# Altium PCB PCB_tms320f28069.pcbdoc (part 1 of 2)
Units mil, origin at the board's own origin, x right, y up, seen from the top; angles counter-clockwise.
Board outline 7604.36 x 4553.97 mil, 2 copper layers (Top Layer, Bottom Layer); 149 components, 214 nets, 843 pads, 168 vias.
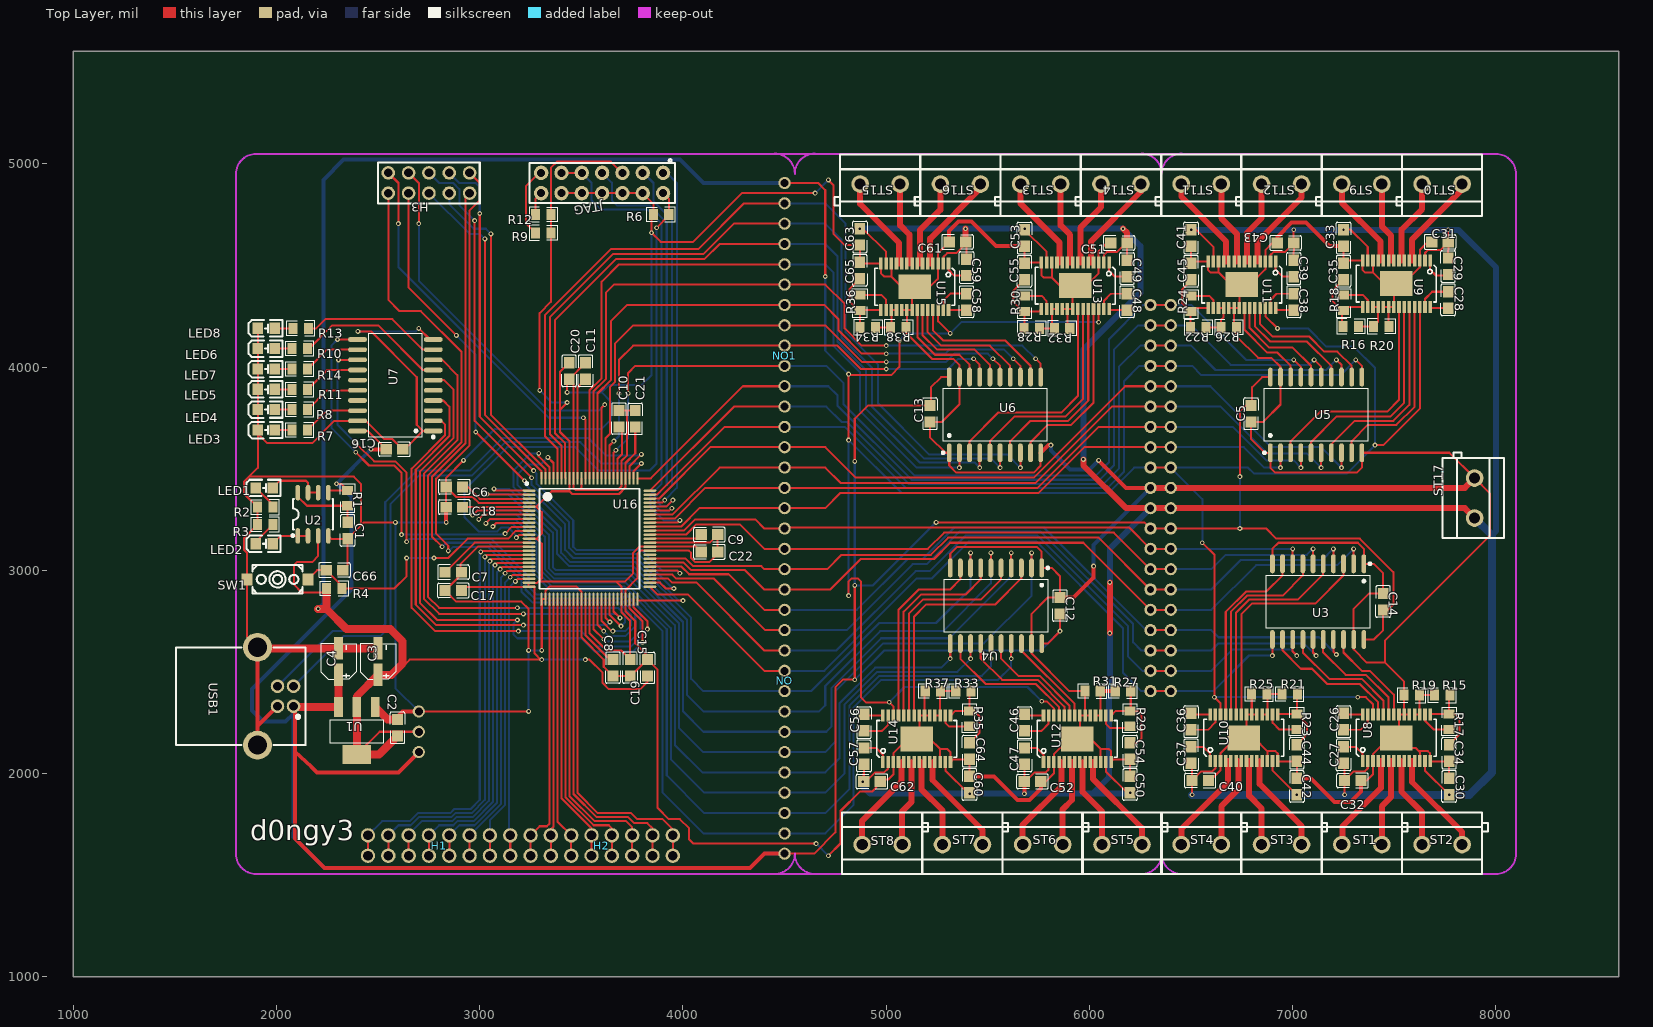
[diagram p0: Top Layer view]
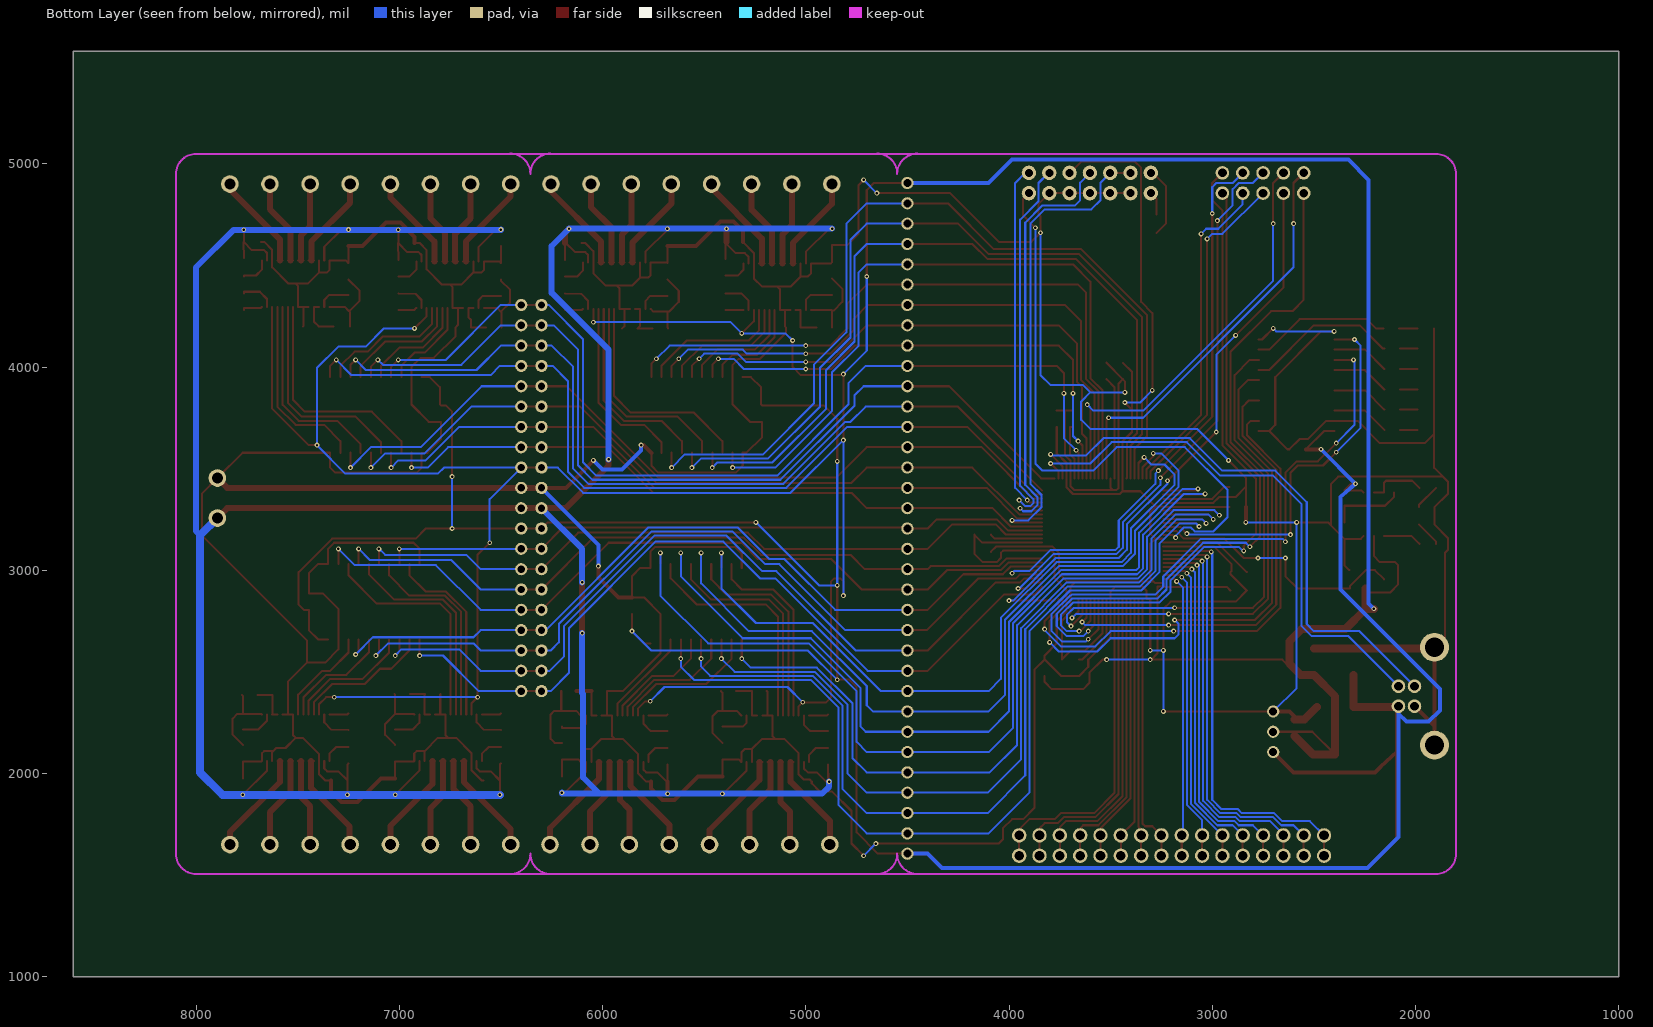
[diagram p1: Bottom Layer view, seen from below]

## Layer stack, top to bottom
Top Layer: signal copper (thickness not stored)
Dielectric: dielectric 12.6, FR-4, Dk 4.8
Bottom Layer: signal copper (thickness not stored)

## Board outline
8604.36,1000 1000,1000 1000,5553.97 8604.36,5553.97

## Components (designator, comment, footprint, x,y, rotation, side; value= is the part's Value field where it differs from the comment)
C1 "1uF" C0805 2350.16,3195.67 r90 top
C2 "470pF" C0805 2595.16,2225.67 r270 top
C3 "10uF" CAP-SMD_BD4.0-L4.3-W4.3-FD-LS4.8 2500.16,2550.67 r90 top
C4 "10uF" CAP-SMD_BD4.0-L4.3-W4.3-FD-LS4.8 2305.16,2550.67 r90 top
C5 "1uF" C0805 6795.16,3770.67 r270 top
C6 "1.2uF" C0805 2875.16,3410.67 r0 top
C7 "1.2uF" C0805 2870.16,2990.67 r180 top
C8 "1.2uF" C0805 3655.16,2520.67 r90 top
C9 "1.2uF" C0805 4130.16,3175.67 r0 top
C10 "1.2uF" C0805 3685.16,3745.67 r90 top
C11 "1.2uF" C0805 3520.16,3980.67 r90 top
C12 "1uF" C0805 5855.16,2825.67 r90 top
C13 "1uF" C0805 5215.16,3770.67 r270 top
C14 "1uF" C0805 7445.16,2845.67 r90 top
C15 "1uF" C0805 3825.16,2520.67 r270 top
C16 "1uF" C0805 2580.16,3595.67 r0 top
C17 "2.2uF" C0805 2870.16,2900.67 r0 top
C18 "2.2uF" C0805 2875.16,3310.67 r0 top
C19 "2.2uF" C0805 3740.16,2520.67 r90 top
C20 "2.2uF" C0805 3440.16,3980.67 r90 top
C21 "2.2uF" C0805 3765.16,3745.67 r270 top
C22 "2.2uF" C0805 4130.16,3090.67 r0 top
C26 "22nF" C0805 7250.16,2255.67 r270 top
C27 "220nF" C0805 7250.16,2090.67 r90 top
C28 "22nF" C0805 7765.16,4330.67 r90 top
C29 "220nF" C0805 7765.16,4495.67 r270 top
C30 "10nF" C0805 7770.16,1935.67 r90 top
C31 "10nF" C0805 7725.16,4615.67 r180 top
C32 "10nF" C0805 7295.16,1965.67 r0 top
C33 "10nF" C0805 7250.16,4635.67 r270 top
C34 "470nF" C0805 7770.16,2100.67 r270 top
C35 "470nF" C0805 7250.16,4470.67 r90 top
C36 "22nF" C0805 6500.16,2255.67 r270 top
C37 "220nF" C0805 6500.16,2090.67 r90 top
C38 "22nF" C0805 7005.16,4320.67 r90 top
C39 "220nF" C0805 7005.16,4485.67 r270 top
C40 "10nF" C0805 6545.16,1965.67 r0 top
C41 "10nF" C0805 6500.16,4635.67 r270 top
C42 "10nF" C0805 7020.16,1935.67 r90 top
C43 "10nF" C0805 6965.16,4610.67 r180 top
C44 "470nF" C0805 7020.16,2100.67 r270 top
C45 "470nF" C0805 6500.16,4470.67 r90 top
C46 "22nF" C0805 5680.16,2250.67 r270 top
C47 "220nF" C0805 5680.16,2085.67 r90 top
C48 "22nF" C0805 6185.16,4320.67 r90 top
C49 "220nF" C0805 6185.16,4485.67 r270 top
C50 "10nF" C0805 6200.16,1945.67 r90 top
C51 "10nF" C0805 6145.16,4610.67 r180 top
C52 "10nF" C0805 5720.16,1960.67 r0 top
C53 "10nF" C0805 5680.16,4635.67 r270 top
C54 "470nF" C0805 6200.16,2110.67 r270 top
C55 "470nF" C0805 5680.16,4470.67 r90 top
C56 "22nF" C0805 4890.16,2250.67 r270 top
C57 "220nF" C0805 4890.16,2085.67 r90 top
C58 "22nF" C0805 5395.16,4320.67 r90 top
C59 "220nF" C0805 5395.16,4490.67 r270 top
C60 "10nF" C0805 5410.16,1945.67 r90 top
C61 "10nF" C0805 5350.16,4615.67 r180 top
C62 "10nF" C0805 4930.16,1960.67 r0 top
C63 "10nF" C0805 4870.16,4640.67 r270 top
C64 "470nF" C0805 5410.16,2110.67 r270 top
C65 "470nF" C0805 4870.16,4475.67 r90 top
C66 "100nF" C0805 2285.16,3000.67 r180 top
H1 "HDR-2×8H" HDR-TH_16P-P2.54-V-M-R2-C8-S2.54 2800.16,1645.67 r180 top
H2 "HDR-2×8H" HDR-TH_16P-P2.54-V-M-R2-C8-S2.54 3600.16,1645.67 r0 top
H3 "com" HDR-TH_10P-P2.54-V-F-R2-C5-S2.54-3 2750.16,4905.67 r180 top
JTAG "JTAG" HDR-TH_14P-P2.54-V-F-R2-C7-S2.54 3602.12,4905.67 r180 top
LED1 "LED" LED0805-FD 1940.16,3405.67 r180 top
LED2 "LED" LED0805-FD 1940.16,3130.67 r180 top
LED3 "LED" LED0805-FD 1950.16,3690.67 r180 top
LED4 "LED" LED0805-FD 1950.16,3790.67 r180 top
LED5 "LED" LED0805-FD 1950.16,3890.67 r180 top
LED6 "LED" LED0805-FD 1950.16,4090.67 r180 top
LED7 "LED" LED0805-FD 1950.16,3990.67 r180 top
LED8 "LED" LED0805-FD 1950.16,4190.67 r180 top
NO "1X16P2.54" 1X16P2.54 4500.16,2455.67 r0 top
NO1 "1X16P2.54" 1X16P2.54 4500.16,4055.67 r0 top
R1 "1.5kΩ" R0805 2350.16,3355.67 r270 top
R2 "1.5kΩ" R0805 1945.16,3310.67 r0 top
R3 "1.5kΩ" R0805 1945.16,3225.67 r0 top
R4 "1kΩ" R0805 2285.16,2910.67 r0 top
R6 "4.7kΩ" R0805 3892.12,4750.67 r0 top
R7 "1.5kΩ" R0805 2115.16,3690.67 r0 top
R8 "1.5kΩ" R0805 2115.16,3790.67 r0 top
R9 "4.7kΩ" R0805 3312.12,4660.67 r180 top
R10 "1.5kΩ" R0805 2115.16,4090.67 r0 top
R11 "1.5kΩ" R0805 2115.16,3889.67 r0 top
R12 "4.7kΩ" R0805 3312.12,4750.67 r180 top
R13 "1.5kΩ" R0805 2120.16,4190.67 r0 top
R14 "1.5kΩ" R0805 2115.16,3990.67 r0 top
R15 "100Ω" R0805 7735.16,2385.67 r0 top
R16 "100Ω" R0805 7285.16,4200.67 r180 top
R17 "4.99kΩ" R0805 7770.16,2255.67 r90 top
R18 "4.99kΩ" R0805 7250.16,4315.67 r270 top
R19 "100Ω" R0805 7585.16,2385.67 r0 top
R20 "100Ω" R0805 7435.16,4200.67 r180 top
R21 "100Ω" R0805 6985.16,2390.67 r0 top
R22 "100Ω" R0805 6535.16,4195.67 r180 top
R23 "4.99kΩ" R0805 7020.16,2255.67 r90 top
R24 "4.99kΩ" R0805 6500.16,4310.67 r270 top
R25 "100Ω" R0805 6835.16,2390.67 r0 top
R26 "100Ω" R0805 6685.16,4195.67 r180 top
R27 "100Ω" R0805 6165.16,2405.67 r0 top
R28 "100Ω" R0805 5715.16,4190.67 r180 top
R29 "4.99kΩ" R0805 6200.16,2270.67 r90 top
R30 "4.99kΩ" R0805 5680.16,4310.67 r270 top
R31 "100Ω" R0805 6015.16,2405.67 r0 top
R32 "100Ω" R0805 5865.16,4190.67 r180 top
R33 "100Ω" R0805 5380.16,2405.67 r0 top
R34 "100Ω" R0805 4910.16,4195.67 r180 top
R35 "4.99kΩ" R0805 5410.16,2270.67 r90 top
R36 "4.99kΩ" R0805 4870.16,4315.67 r270 top
R37 "100Ω" R0805 5230.16,2405.67 r0 top
R38 "100Ω" R0805 5060.16,4195.67 r180 top
ST1 "KF301-5.0-2P" CONN-TH_P5.00_KF301-5.0-2P 7340.16,1650.67 r0 top
ST2 "KF301-5.0-2P" CONN-TH_P5.00_KF301-5.0-2P 7735.16,1650.67 r0 top
ST3 "KF301-5.0-2P" CONN-TH_P5.00_KF301-5.0-2P 6945.16,1650.67 r0 top
ST4 "KF301-5.0-2P" CONN-TH_P5.00_KF301-5.0-2P 6550.16,1650.67 r0 top
ST5 "KF301-5.0-2P" CONN-TH_P5.00_KF301-5.0-2P 6160.16,1650.67 r0 top
ST6 "KF301-5.0-2P" CONN-TH_P5.00_KF301-5.0-2P 5770.16,1650.67 r0 top
ST7 "KF301-5.0-2P" CONN-TH_P5.00_KF301-5.0-2P 5375.16,1650.67 r0 top
ST8 "KF301-5.0-2P" CONN-TH_P5.00_KF301-5.0-2P 4980.16,1650.67 r0 top
ST9 "KF301-5.0-2P" CONN-TH_P5.00_KF301-5.0-2P 7340.16,4900.67 r180 top
ST10 "KF301-5.0-2P" CONN-TH_P5.00_KF301-5.0-2P 7735.16,4900.67 r180 top
ST11 "KF301-5.0-2P" CONN-TH_P5.00_KF301-5.0-2P 6550.16,4900.67 r180 top
ST12 "KF301-5.0-2P" CONN-TH_P5.00_KF301-5.0-2P 6945.16,4900.67 r180 top
ST13 "KF301-5.0-2P" CONN-TH_P5.00_KF301-5.0-2P 5760.16,4900.67 r180 top
ST14 "KF301-5.0-2P" CONN-TH_P5.00_KF301-5.0-2P 6155.16,4900.67 r180 top
ST15 "KF301-5.0-2P" CONN-TH_P5.00_KF301-5.0-2P 4970.16,4900.67 r180 top
ST16 "KF301-5.0-2P" CONN-TH_P5.00_KF301-5.0-2P 5365.16,4900.67 r180 top
ST17 "KF301-5.0-2P" CONN-TH_P5.00_KF301-5.0-2P 7895.16,3355.67 r90 top
SW1 "K2" KEY-SMD_L6.2-W3.6-LS8.0 2005.16,2955.67 r180 top
U1 "AMS1117-ADJ_C2891840" SOT-223-3_L6.5-W3.4-P2.30-LS7.0-BR 2395.16,2210.67 r90 top
U2 "LM358A-SR" SOIC-8_L5.0-W4.0-P1.27-LS6.0-BL 2180.16,3275.67 r0 top
U3 "74HC244D" SOIC-20_L13.0-W7.6-P1.27-LS10.3-BL 7125.16,2845.67 r180 top
U4 "74HC244D" SOIC-20_L13.0-W7.6-P1.27-LS10.3-BL 5540.16,2825.67 r180 top
U5 "74HC244D" SOIC-20_L13.0-W7.6-P1.27-LS10.3-BL 7115.16,3764.61 r0 top
U6 "74HC244D" SOIC-20_L13.0-W7.6-P1.27-LS10.3-BL 5535.16,3764.61 r0 top
U7 "74HC244D" SOIC-20_L13.0-W7.6-P1.27-LS10.3-BL 2585.16,3910.67 r90 top
U8 "DRV8424PPWPR" TSSOP_28_POWERPAD 7510.16,2175.67 r90 top
U9 "DRV8424PPWPR" TSSOP_28_POWERPAD 7510.16,4410.67 r270 top
U10 "DRV8424PPWPR" TSSOP_28_POWERPAD 6760.16,2175.67 r90 top
U11 "DRV8424PPWPR" TSSOP_28_POWERPAD 6750.16,4405.67 r270 top
U12 "DRV8424PPWPR" TSSOP_28_POWERPAD 5940.16,2170.67 r90 top
U13 "DRV8424PPWPR" TSSOP_28_POWERPAD 5930.16,4400.67 r270 top
U14 "DRV8424PPWPR" TSSOP_28_POWERPAD 5150.16,2170.67 r90 top
U15 "DRV8424PPWPR" TSSOP_28_POWERPAD 5140.16,4395.67 r270 top
U16 "TMS320F28069PZT" LQFP-100_L14.0-W14.0-P0.50-LS16.0-BL 3540.16,3155.67 r270 top
USB1 "USB" USB-B_TH_BF90 1995.16,2380.67 r270 top

## Footprints (in the part's own frame and the unit in brackets; to place one, negate y for a bottom-side part, rotate by r counter-clockwise, add the part's x,y. Pads: shape width x height; smd on the part's side, far side on the other; paste and mask are expansions set on the pad)
1X16P2.54 [mil]
  round 60 hole 39.37: 1(0,750) 2(0,650) 3(0,550) 4(0,450) 5(0,350) 6(0,250) 7(0,150) 8(0,50) 9(0,-50) 10(0,-150) 11(0,-250) 12(0,-350) 13(0,-450) 14(0,-550) 15(0,-650) 16(0,-750)
C0805 [mm]
  rect 1.41x1.35 smd: 1(-1.03,0) 2(1.03,0)
  silkscreen extent -1.96,-0.9 1.96,0.9
CAP-SMD_BD4.0-L4.3-W4.3-FD-LS4.8 [mm]
  rect 2.8x1.1 smd: 1(-1.661,0) 2(1.66,0)
  silkscreen extent -2.22,-2.23 2.24,2.23
CONN-TH_P5.00_KF301-5.0-2P [mm]
  round 2.2 hole 1.4: 1(-2.5,0) 2(2.5,0)
  silkscreen extent -5,-3.7 5.71,4
HDR-TH_10P-P2.54-V-F-R2-C5-S2.54-3 [mm]
  round 1.7 hole 1.1: 1(5.08,1.27) 2(5.08,-1.27) 3(2.54,1.27) 4(2.54,-1.27) 5(0,1.27) 6(0,-1.27) 7(-2.54,1.27) 8(-2.54,-1.27) 9(-5.08,1.27) 10(-5.08,-1.27)
  silkscreen extent -6.35,-2.54 6.35,2.54
HDR-TH_14P-P2.54-V-F-R2-C7-S2.54 [mm]
  round 1.8 hole 1: 1(-7.62,-1.27) 2(-7.62,1.27) 3(-5.08,-1.27) 4(-5.08,1.27) 5(-2.54,-1.27) 6(-2.54,1.27) 7(0,-1.27) 8(0,1.27) 9(2.54,-1.27) 10(2.54,1.27) 11(5.08,-1.27) 12(5.08,1.27) 13(7.62,-1.27) 14(7.62,1.27)
  silkscreen extent -9.09,-2.97 9.09,2.5
HDR-TH_16P-P2.54-V-M-R2-C8-S2.54 [mm]
  round 1.8 hole 1.2: 1(-8.89,-1.27) 2(-8.89,1.27) 3(-6.35,-1.27) 4(-6.35,1.27) 5(-3.81,-1.27) 6(-3.81,1.27) 7(-1.27,-1.27) 8(-1.27,1.27) 9(1.27,-1.27) 10(1.27,1.27) 11(3.81,-1.27) 12(3.81,1.27) 13(6.35,-1.27) 14(6.35,1.27) 15(8.89,-1.27) 16(8.89,1.27)
KEY-SMD_L6.2-W3.6-LS8.0 [mm]
  rect 1.4x1.5 smd: 1(-3.8,0) 2(3.8,0)
  silkscreen extent -3.1,-1.8 3.1,1.8
LED0805-FD [mil]
  rect 51.2x55.1 smd: 1(-41.35,0) 2(41.35,0)
  silkscreen extent -78,-40 88,41
LQFP-100_L14.0-W14.0-P0.50-LS16.0-BL [mm]
  oval 0.3x1.6 smd: 1(-6,-7.55) 2(-5.5,-7.55) 3(-5,-7.55) 4(-4.5,-7.55) 5(-4,-7.55) 6(-3.5,-7.55) 7(-3,-7.55) 8(-2.5,-7.55) 9(-2,-7.55) 10(-1.5,-7.55) 11(-1,-7.55) 12(-0.5,-7.55) 13(0,-7.55) 14(0.5,-7.55) 15(1,-7.55) 16(1.5,-7.55) 17(2,-7.55) 18(2.5,-7.55) 19(3,-7.55) 20(3.5,-7.55) 21(4,-7.55) 22(4.5,-7.55) 23(5,-7.55) 24(5.5,-7.55) 25(6,-7.55) 51(6,7.55) 52(5.5,7.55) 53(5,7.55) 54(4.5,7.55) 55(4,7.55) 56(3.5,7.55) 57(3,7.55) 58(2.5,7.55) 59(2,7.55) 60(1.5,7.55) 61(1,7.55) 62(0.5,7.55) 63(0,7.55) 64(-0.5,7.55) 65(-1,7.55) 66(-1.5,7.55) 67(-2,7.55) 68(-2.5,7.55) 69(-3,7.55) 70(-3.5,7.55) 71(-4,7.55) 72(-4.5,7.55) 73(-5,7.55) 74(-5.5,7.55) 75(-6,7.55)
  oval 1.6x0.3 smd: 26(7.55,-6) 27(7.55,-5.5) 28(7.55,-5) 29(7.55,-4.5) 30(7.55,-4) 31(7.55,-3.5) 32(7.55,-3) 33(7.55,-2.5) 34(7.55,-2) 35(7.55,-1.5) 36(7.55,-1) 37(7.55,-0.5) 38(7.55,0) 39(7.55,0.5) 40(7.55,1) 41(7.55,1.5) 42(7.55,2) 43(7.55,2.5) 44(7.55,3) 45(7.55,3.5) 46(7.55,4) 47(7.55,4.5) 48(7.55,5) 49(7.55,5.5) 50(7.55,6) 76(-7.55,6) 77(-7.55,5.5) 78(-7.55,5) 79(-7.55,4.5) 80(-7.55,4) 81(-7.55,3.5) 82(-7.55,3) 83(-7.55,2.5) 84(-7.55,2) 85(-7.55,1.5) 86(-7.55,1) 87(-7.55,0.5) 88(-7.55,0) 89(-7.55,-0.5) 90(-7.55,-1) 91(-7.55,-1.5) 92(-7.55,-2) 93(-7.55,-2.5) 94(-7.55,-3) 95(-7.55,-3.5) 96(-7.55,-4) 97(-7.55,-4.5) 98(-7.55,-5) 99(-7.55,-5.5) 100(-7.55,-6)
  silkscreen extent -7.03,-8 6.25,6.25
R0805 [mil]
  rect 44.59x54.21 smd: 1(-38.04,0) 2(38.04,0)
  silkscreen extent -69,-36 69,36
SOIC-8_L5.0-W4.0-P1.27-LS6.0-BL [mil]
  oval 22.38x76.78 smd: 1(-75,-106.5) 2(-25,-106.5) 3(25,-106.5) 4(75,-106.5) 5(75,106.5) 6(25,106.5) 7(-25,106.5) 8(-75,106.5)
  silkscreen extent -106,-111 98,75
SOIC-20_L13.0-W7.6-P1.27-LS10.3-BL [mm]
  oval 0.595x2.36 smd: 1(-5.715,-4.73) 2(-4.445,-4.73) 3(-3.175,-4.73) 4(-1.905,-4.73) 5(-0.635,-4.73) 6(0.635,-4.73) 7(1.905,-4.73) 8(3.175,-4.73) 9(4.445,-4.73) 10(5.715,-4.73) 11(5.715,4.73) 12(4.445,4.73) 13(3.175,4.73) 14(1.905,4.73) 15(0.635,4.73) 16(-0.635,4.73) 17(-1.905,4.73) 18(-3.175,4.73) 19(-4.445,4.73) 20(-5.715,4.73)
  silkscreen extent -6.61,-4.88 6.48,3.32
SOT-223-3_L6.5-W3.4-P2.30-LS7.0-BR [mm]
  rect 2.5x1.1 smd: 1(2.97,-2.3) 2(2.97,0) 3(2.97,2.3)
  rect 2.34x3.6 smd: 4(-2.97,0)
  silkscreen extent -1.57,-3.33 1.37,3.33
TSSOP_28_POWERPAD [mm]
  rect 1.5x0.45 smd: 1(-2.9,4.225) 2(-2.9,3.575) 3(-2.9,2.925) 4(-2.9,2.275) 5(-2.9,1.625) 6(-2.9,0.975) 6(-2.9,0.975) 7(-2.9,0.325) 8(-2.9,-0.325) 9(-2.9,-0.975) 10(-2.9,-1.625) 11(-2.9,-2.275) 12(-2.9,-2.925) 13(-2.9,-3.575) 14(-2.9,-4.225) 15(2.9,-4.225) 16(2.9,-3.575) 17(2.9,-2.925) 18(2.9,-2.275) 19(2.9,-1.625) 20(2.9,-0.975) 21(2.9,-0.325) 22(2.9,0.325) 23(2.9,0.975) 24(2.9,1.625) 25(2.9,2.275) 26(2.9,2.925) 27(2.9,3.575) 28(2.9,4.225)
  rect 3.1x4.05 smd: 29(0,0)
  silkscreen extent -2.3,-5 2.3,5
USB-B_TH_BF90 [mm]
  round 1.7 hole 1.1: 1(1.25,2.25) 2(-1.25,2.25) 3(-1.25,0.25) 4(1.25,0.25)
  round 3.6 hole 2.4: 5(-6.116,-2.25) 5(6.116,-2.25)
  silkscreen extent -6.1,-12.45 6.11,3.75

## Free pads (board coordinates)
  round 60 hole 39.37: 1(4500.16,1605.67) 2(4500.16,4905.67) 4(2700.16,2305.67) 5(2700.16,2205.67) 6(2700.16,2105.67)
  round 60 hole 36: 7(6300.16,3905.67) 8(6300.16,3805.67) 9(6300.16,3705.67) 10(6300.16,3605.67) 11(6300.16,4305.67) 12(6300.16,4205.67) 13(6300.16,4105.67) 14(6300.16,4005.67) 15(6300.16,2805.67) 16(6300.16,2905.67) 17(6300.16,3005.67) 18(6300.16,3105.67) 19(6300.16,2705.67) 20(6300.16,2605.67) 21(6300.16,2505.67) 22(6300.16,2405.67) 24(6400.16,4305.67) 25(6400.16,4205.67) 26(6400.16,4105.67) 27(6400.16,4005.67) 28(6400.16,3905.67) 29(6400.16,3805.67) 30(6400.16,3705.67) 31(6400.16,3605.67) 32(6400.16,2405.67) 33(6400.16,2505.67) 34(6400.16,2605.67) 35(6400.16,2705.67) 36(6400.16,2805.67) 37(6400.16,2905.67) 38(6400.16,3005.67) 39(6400.16,3105.67) 40(6400.16,3405.67) 41(6400.16,3305.67) 42(6300.16,3405.67) 43(6300.16,3305.67) 44(6300.16,3505.67) 45(6400.16,3505.67) 46(6300.16,3205.67) 47(6400.16,3205.67)

## Via types
v1: diameter 24, hole 12, Top Layer to Bottom Layer, tented both sides, 168 vias

## Nets (pads, with @x,y where several pads share a name; then routed paths per layer and width w, separated by ;. In a path a pad name is that pad's centre, name@x,y a point inside that pad or via, vN(x,y) a via of type N, cw(c..) or ccw(c..) an arc to the next point about the centre after c; other vN are vias at no path point)
3.3V: C2.2 C3.1 C15.2 C17.2 C18.2 C19.2 C20.2 C21.2 C22.1 JTAG.5 pad.2 pad.5 pad.44 pad.45 R4.1 R9.1 R12.1 U1.2 U1.4 U2.3 U8.26 U9.26 U10.26 U11.26 U12.26 U13.26 U14.26 U15.26 U16.5 U16.13 U16.24 U16.25 U16.38 U16.46 U16.61 U16.79 U16.93 | length 27625.8
  Top Layer w10: U2.3@2205.16,3169.17 2205.16,3070.67 2175.16,3040.67 2100.16,3040.67 2085.16,3025.67 2085.16,2930.67 2125.16,2890.67 2247.16,2890.67 R4.1@2247.16,2910.67 ; U1.4@2395.16,2093.74 2507.09,2205.67 pad.5@2700.16,2205.67 ; C3.1@2500.15,2485.29 2579.78,2485.29 2655.16,2560.67 v1(3305.16,2560.67) 3300.16,2560.67 3270.16,2590.67 3270.16,2919.47 U16.25@3242.96,2919.47 ; C17.2@2910.71,2900.67 2928.27,2918.23 3240.91,2918.23 U16.24@3240.91,2937.91 ; C18.2@2915.71,3310.67 2916.97,3311.93 U16.5@3240.91,3311.93 ; U16.24@3240.96,2937.87 3282.36,2937.87 ; U16.13@3240.96,3154.47 3281.36,3154.47 3305.16,3130.67 3305.16,2960.67 3282.36,2937.87 ; U16.13@3242.92,3155.67 3280.16,3155.67 3305.16,3180.67 3305.16,3285.67 3277.68,3313.15 U16.5@3242.92,3313.15 ; U16.5@3242.96,3313.17 3277.66,3313.17 3353.56,3389.07 3441.76,3389.07 ; v1(3295.16,3885.67) 3295.16,4265.67 3350.16,4320.67 R9.1@3350.16,4660.67 R12.1@3350.16,4750.67 3350.16,4980.67 3380.16,5010.67 3645.16,5010.67 3700.16,4955.67 JTAG.5@3702.12,4955.67 ; 3395.16,3772.57 3395.16,3790.67 v1(3430.16,3825.67) ; C20.2@3440.16,4021.22 3395.16,3976.17 3395.16,3680.67 3441.76,3634.07 U16.93@3441.76,3452.87 ; U16.93@3441.73,3452.91 3441.73,3389.1 3455.16,3375.67 3685.16,3375.67 3717.33,3407.84 U16.79@3717.33,3452.91 ; v1(3520.16,2560.67) 3540.16,2560.67 3605.16,2495.67 3605.16,2445.67 3635.16,2415.67 3790.16,2415.67 3825.16,2450.67 C15.2@3825.16,2480.17 ; U16.38@3540.16,2858.43 3540.16,2690.67 3625.16,2605.67 3695.65,2605.67 C19.2@3740.16,2561.22 3740.16,2750.67 3697.66,2793.17 3697.66,2858.47 3697.66,2918.17 3670.16,2945.67 ; U16.79@3717.36,3452.87 3717.36,3527.87 3765.16,3575.67 C21.2@3765.16,3705.17 ; U16.61@3837.4,3116.3 3785.76,3116.27 3755.16,3085.67 3755.16,2985.67 3715.16,2945.67 3670.16,2945.67 ; U16.61@3837.4,3116.3 4063.98,3116.3 C22.1@4089.61,3090.67 ; pad.2@4500.16,4905.67 4665.16,4905.67 4700.16,4870.67 v1(4700.16,4445.67) ; v1(4815.16,2875.67) 4815.16,2945.67 4830.16,2960.67 4860.16,2960.67 4875.16,2945.67 4875.16,2375.67 4900.16,2350.67 v1(5015.16,2350.67) 5034.96,2330.87 U14.26@5034.96,2284.87 ; v1(4815.16,3640.67) v1(4815.16,3965.67) 4820.16,3960.67 5025.16,3960.67 5065.16,4000.67 v1(5065.16,4130.67) ; U15.26@5255.31,4281.5 5255.32,4225.51 v1(5315.16,4165.67) ; v1(5765.16,2355.67) 5790.16,2355.67 5824.99,2320.83 U12.26@5825,2284.84 ; v1(6045.16,4220.67) 6045.16,4286.27 U13.26@6045.36,4286.47 ; pad.44@6300.16,3505.67 pad.45@6400.16,3505.67 ; v1(6555.16,3135.67) 6615.16,3075.67 v1(6615.16,2375.67) 6645,2345.83 U10.26@6645,2289.84 ; U11.26@6865.31,4291.5 6865.32,4250.51 v1(6925.16,4190.67) ; v1(7320.16,2375.67) 7360.16,2375.67 7394.99,2340.83 U8.26@7395,2289.84 ; v1(7405.16,3615.67) 7445.16,3615.67 7625.36,3795.87 U9.26@7625.36,4296.47 ; 3282.36,2937.87 3290.16,2945.67 3670.16,2945.67
  Top Layer w39.37: v1(2205.16,2810.67) 2245.16,2810.67 2247.16,2808.67 ; R4.1@2247.16,2910.67 2247.16,2808.67 ; U1.2@2395.16,2327.6 2395.16,2380.27 C3.1@2500.15,2485.29 2564.76,2485.27 2620.16,2540.67 2620.16,2650.67 2560.16,2710.67 2345.16,2710.67 2247.16,2808.67 ; U1.2@2395.16,2327.6 U1.4@2395.16,2093.74 2503.76,2093.77 C2.2@2595.16,2185.17
  Bottom Layer w10: v1(3295.16,3885.67) 3355.16,3825.67 v1(3430.16,3825.67) ; v1(3305.16,2560.67) v1(3520.16,2560.67) ; v1(4700.16,4445.67) 4700.16,4080.67 v1(4815.16,3965.67) ; v1(4815.16,2875.67) v1(4815.16,3640.67) 5075.16,3380.67 6095.16,3380.67 6220.16,3505.67 pad.44@6300.16,3505.67 ; v1(5015.16,2350.67) 5090.16,2425.67 5695.16,2425.67 v1(5765.16,2355.67) ; v1(5065.16,4130.67) 5100.16,4165.67 v1(5315.16,4165.67) 5370.16,4220.67 v1(6045.16,4220.67) ; v1(6555.16,3135.67) 6555.16,3350.67 pad.45@6400.16,3505.67 6780.16,3505.67 6810.16,3475.67 7265.16,3475.67 v1(7405.16,3615.67) 7405.16,3995.67 7300.16,4100.67 7165.16,4100.67 7075.16,4190.67 v1(6925.16,4190.67) ; v1(6615.16,2375.67) v1(7320.16,2375.67)
  Bottom Layer w19.68: v1(2205.16,2810.67) 2230.16,2835.67 2230.16,4920.67 2330.16,5020.67 3985.16,5020.67 4100.16,4905.67 pad.2@4500.16,4905.67
+5V: C4.1 C5.1 C12.1 C13.1 C14.1 C16.1 pad.1 pad.6 pad.46 pad.47 R1.1 U1.3 U2.5 U3.20 U4.20 U5.20 U6.20 U7.20 USB1.1 | length 18139
  Top Layer w10: U2.5@2255.16,3382.17 2266.7,3393.71 R1.1@2350.16,3393.71 2318.2,3425.67 v1(2295.16,3425.67) ; U7.20@2398.94,3685.67 2449.61,3685.67 C16.1@2539.61,3595.67 ; pad.1@4500.16,1605.67 4645.16,1605.67 4750.16,1710.67 4750.16,2425.37 4786.46,2461.67 v1(4845.16,2461.51) ; v1(4845.16,2461.51) 4845.16,2590.67 v1(4845.16,2925.67) ; v1(4845.16,3535.67) 4845.16,3745.67 4910.71,3811.22 C13.1@5215.16,3811.22 5220.16,3816.22 5220.16,3900.67 5270.32,3950.83 U6.20@5310.16,3950.83 ; v1(5245.16,3235.67) 6270.16,3235.67 pad.46@6300.16,3205.67 pad.47@6400.16,3205.67 v1(6740.16,3205.67) 6870.16,3205.67 6920.16,3155.67 7330.16,3155.67 7495.16,2990.67 7495.16,2830.67 7469.56,2805.17 C14.1@7445.16,2805.17 ; U4.20@5765.16,2639.45 5793.94,2639.45 v1(5855.16,2700.67) C12.1@5855.16,2785.12 ; v1(6740.16,3460.67) 6740.16,3780.67 6770.7,3811.22 C5.1@6795.16,3811.22 6800.16,3816.22 6800.16,3900.67 6850.32,3950.83 U5.20@6890.16,3950.83 ; U3.20@7350.16,2659.45 7398.94,2659.45 7445.16,2705.67 C14.1@7445.16,2805.12
  Top Layer w19.68: USB1.1@2083.76,2331.47 2090.16,2325.07 2090.16,1680.67 2235.16,1535.67 4330.16,1535.67 4400.16,1605.67 pad.1@4500.16,1605.67 ; 2090.16,2107.94 2173.36,2032.46 2200.16,2005.67 2600.16,2005.67 pad.6@2700.16,2105.67 ; v1(2465.16,3595.67) C16.1@2539.61,3595.67
  Top Layer w39.37: USB1.1@2083.74,2331.46 2087.6,2327.6 U1.3@2304.61,2327.6 ; U1.3@2304.66,2327.57 C4.1@2305.15,2485.29
  Bottom Layer w10: v1(4845.16,2461.51) 4989.36,2605.67 5760.16,2605.67 v1(5855.16,2700.67) ; v1(4845.16,3535.67) v1(4845.16,2925.67) 4935.16,2925.67 v1(5245.16,3235.67) ; v1(6740.16,3205.67) v1(6740.16,3460.67)
  Bottom Layer w19.68: v1(2465.16,3595.67) v1(2295.16,3425.67) 2370.16,3360.17 2370.16,2905.67 1880.16,2415.67 1880.16,2310.67 1935.16,2255.67 2045.16,2255.67 2083.76,2294.27 2083.76,2331.47 2083.76,1687.07 2235.16,1535.67 4330.16,1535.67 4400.16,1605.67 pad.1@4500.16,1605.67
ADCINA0: H1.1 H1.2 U16.23 | length 1438.1
  Top Layer w10: H1.2@3150.16,1595.67 H1.1@3150.16,1695.67 ; v1(3175.16,2945.67) 3187.09,2957.6 U16.23@3240.91,2957.6
  Bottom Layer w10: H1.1@3150.16,1695.67 3145.16,1695.67 3145.16,2915.67 v1(3175.16,2945.67)
ADCINA1: H1.3 H1.4 U16.22 | length 1507
  Top Layer w10: H1.4@3050.16,1595.67 H1.3@3050.16,1695.67 ; v1(3150.16,2965.67) 3161.76,2977.28 U16.22@3240.91,2977.28
  Bottom Layer w10: H1.3@3050.16,1695.67 3050.16,1770.67 3125.16,1845.67 3125.16,2940.67 v1(3150.16,2965.67)
ADCINA2: H1.5 H1.6 U16.21 | length 1582.9
  Top Layer w10: H1.6@2950.16,1595.67 H1.5@2950.16,1695.67 ; v1(3125.16,2985.67) 3136.45,2996.97 U16.21@3240.91,2996.97
  Bottom Layer w10: H1.5@2950.16,1695.67 3105.16,1850.67 3105.16,2965.67 v1(3125.16,2985.67)
ADCINA3: H1.7 H1.8 U16.20 | length 1702.8
  Top Layer w10: H1.8@2850.16,1595.67 H1.7@2850.16,1695.67 ; v1(3100.16,3005.67) 3111.14,3016.65 U16.20@3240.91,3016.65
  Bottom Layer w10: H1.7@2850.16,1695.67 2900.16,1745.67 2975.16,1745.67 3085.16,1855.67 3085.16,2990.67 v1(3100.16,3005.67)
ADCINA4: H1.9 H1.10 U16.19 | length 1828.5
  Top Layer w10: H1.10@2750.16,1595.67 H1.9@2750.16,1695.67 ; v1(3075.16,3025.67) 3085.82,3036.34 U16.19@3240.91,3036.34
  Bottom Layer w10: H1.9@2750.16,1695.67 2800.16,1745.67 2870.16,1745.67 2890.16,1765.67 2970.16,1765.67 3065.16,1860.67 3065.16,3025.67 v1(3075.16,3025.67)
ADCINA5: H1.11 H1.12 U16.18 | length 1948.4
  Top Layer w10: H1.12@2650.16,1595.67 H1.11@2650.16,1695.67 ; v1(3050.16,3045.67) 3060.51,3056.02 U16.18@3240.91,3056.02
  Bottom Layer w10: H1.11@2650.16,1695.67 2650.16,1700.67 2715.16,1765.67 2865.16,1765.67 2885.16,1785.67 2965.16,1785.67 3045.16,1865.67 3045.16,3045.67 v1(3050.16,3045.67)
ADCINA6: H1.13 H1.14 U16.17 | length 2062.4
  Top Layer w10: H1.14@2550.16,1595.67 H1.13@2550.16,1695.67 ; v1(3025.16,3065.67) 3035.2,3075.71 U16.17@3240.91,3075.71
  Bottom Layer w10: H1.13@2550.16,1695.67 2600.16,1745.67 2660.16,1745.67 2700.16,1785.67 2860.16,1785.67 2880.16,1805.67 2960.16,1805.67 3025.16,1870.67 v1(3025.16,3065.67)
ADCINA7: H1.15 H1.16 U16.16 | length 2185.4
  Top Layer w10: H1.16@2450.16,1595.67 H1.15@2450.16,1695.67 ; v1(3005.16,3090.67) 3005.16,3095.67 U16.16@3240.96,3095.67
  Bottom Layer w10: H1.15@2450.16,1695.67 2520.16,1765.67 2655.16,1765.67 2695.16,1805.67 2855.16,1805.67 2875.16,1825.67 2955.16,1825.67 3000.16,1870.67 3000.16,3085.67 v1(3005.16,3090.67)
ADCINB0: H2.1 H2.2 U16.28 | length 1321.8
  Top Layer w10: H2.1@3250.16,1595.67 H2.2@3250.16,1695.67 3295.16,1740.67 3330.16,1740.67 3343.31,1753.82 U16.28@3343.31,2858.43
ADCINB1: H2.3 H2.4 U16.29 | length 1268.1
  Top Layer w10: H2.3@3350.16,1595.67 H2.4@3350.16,1695.67 3350.16,1725.67 3362.99,1738.5 U16.29@3362.99,2858.43
ADCINB2: H2.5 H2.6 U16.30 | length 1290.7
  Top Layer w10: U16.30@3382.68,2858.43 3382.68,1763.15 H2.6@3450.16,1695.67 H2.5@3450.16,1595.67
ADCINB3: H2.7 H2.8 U16.31 | length 1324
  Top Layer w10: U16.31@3402.36,2858.43 3402.36,1878.47 3550.16,1730.67 H2.8@3550.16,1695.67 H2.7@3550.16,1595.67
ADCINB4: H2.9 H2.10 U16.32 | length 1401.2
  Top Layer w10: U16.32@3422.05,2858.43 3422.05,1883.78 3560.16,1745.67 3635.16,1745.67 3650.16,1730.67 H2.10@3650.16,1695.67 H2.9@3650.16,1595.67
ADCINB5: H2.11 H2.12 U16.33 | length 1481.3
  Top Layer w10: U16.33@3441.73,2858.43 3441.73,1889.1 3565.16,1765.67 3720.16,1765.67 3750.16,1735.67 H2.12@3750.16,1695.67 H2.11@3750.16,1595.67
ADCINB6: H2.13 H2.14 U16.34 | length 1552.7
  Top Layer w10: U16.34@3461.42,2858.43 3461.42,1899.41 3575.16,1785.67 3730.16,1785.67 3760.16,1755.67 3825.16,1755.67 3850.16,1730.67 H2.14@3850.16,1695.67 H2.13@3850.16,1595.67
ADCINB7: H2.15 H2.16 U16.35 | length 1626.9
  Top Layer w10: U16.35@3481.1,2858.43 3481.1,1904.73 3580.16,1805.67 3745.16,1805.67 3775.16,1775.67 3900.16,1775.67 3950.16,1725.67 H2.16@3950.16,1695.67 H2.15@3950.16,1595.67
C26_1: C26.1 U8.28 | length 96.3
  Top Layer w10: C26.1@7250.16,2296.22 7256.54,2289.84 U8.28@7343.82,2289.84
C26_2: C26.2 U8.27 | length 172.9
  Top Layer w10: C26.2@7250.16,2215.17 7335.16,2215.67 7369.36,2251.37 U8.27@7369.36,2289.87
C27_2: C27.2 U8.1 | length 143.2
  Top Layer w10: C27.2@7250.16,2131.22 7310.16,2130.67 7343.86,2096.97 U8.1@7343.86,2061.47
C38_1: C38.1 U11.28 | length 93.4
  Top Layer w10: U11.28@6916.49,4291.5 6927.88,4280.12 C38.1@7005.16,4280.12
C38_2: C38.2 U11.27 | length 165.9
  Top Layer w10: U11.27@6890.96,4291.47 6890.96,4329.97 6920.16,4360.67 C38.2@7005.16,4361.22
C39_2: C39.2 U11.1 | length 143.3
  Top Layer w10: U11.1@6916.46,4519.87 6916.46,4479.37 6950.76,4445.17 C39.2@7005.16,4445.17
C48_1: C48.1 U13.28 | length 91.3
  Top Layer w10: U13.28@6096.49,4286.5 6102.88,4280.12 C48.1@6185.16,4280.12
C48_2: C48.2 U13.27 | length 167.9
  Top Layer w10: U13.27@6070.96,4286.47 6070.96,4324.97 6105.16,4360.67 C48.2@6185.16,4361.22
C49_2: C49.2 U13.1 | length 141.1
  Top Layer w10: U13.1@6096.46,4514.87 6096.46,4474.37 6125.16,4445.67 C49.2@6185.16,4445.17
C56_1: C56.1 U14.28 | length 96.3
  Top Layer w10: C56.1@4890.16,2291.22 4896.54,2284.84 U14.28@4983.82,2284.84
C56_2: C56.2 U14.27 | length 176.3
  Top Layer w10: C56.2@4890.16,2210.17 4980.16,2210.67 5009.36,2239.97 U14.27@5009.36,2284.87
C57_2: C57.2 U14.1 | length 143.2
  Top Layer w10: C57.2@4890.16,2126.22 4950.16,2125.67 4983.86,2091.97 U14.1@4983.86,2056.47
GND: C1.1 C2.1 C3.2 C4.2 C5.2 C6.1 C7.1 C8.1 C9.2 C10.2 C11.2 C12.2 C13.2 C14.2 C15.1 C16.2 C17.1 C18.1 C19.1 C20.1 C21.1 C22.2 C30.2 C31.2 C32.2 C33.2 C34.2 C35.2 C40.2 C41.2 C42.2 C43.2 C44.2 C45.2 C50.2 C51.2 C52.2 C53.2 C54.2 C55.2 C60.2 C61.2 C62.2 C63.2 C64.2 C65.2 C66.1 JTAG.4 JTAG.6 JTAG.8 JTAG.10 JTAG.12 LED3.2 LED4.2 LED5.2 LED6.2 LED7.2 LED8.2 pad.4 pad.40 pad.42 R2.1 R3.1 R6.1 R19.1 R20.1 R25.1 R26.1 R31.1 R32.1 R37.1 R38.1 ST17.2 SW1.2 U1.1 U2.4 U3.1 U3.10 U3.19 U4.1 U4.10 U4.19 U5.1 U5.10 U5.19 U6.1 U6.10 U6.19 U7.1 U7.10 U7.19 U8.3 U8.12 U8.14 U8.19 U8.20 U8.21 U8.29 U9.3 U9.12 U9.14 U9.19 U9.20 U9.21 U9.29 U10.3 U10.12 U10.14 U10.19 U10.20 U10.21 U10.29 U11.3 U11.12 U11.14 U11.19 U11.20 U11.21 U11.29 U12.3 U12.12 U12.14 U12.19 U12.20 U12.21 U12.29 U13.3 U13.12 U13.14 U13.19 U13.20 U13.21 U13.29 U14.3 U14.12 U14.14 U14.19 U14.20 U14.21 U14.29 U15.3 U15.12 U15.14 U15.19 U15.20 U15.21 U15.29 U16.4 U16.15 U16.26 U16.27 U16.36 U16.47 U16.60 U16.62 U16.80 U16.90 U16.92 USB1.4 USB1.5 | length 42877.1
  Top Layer w10: 1865.16,3460.67 2380.16,3460.67 2415.16,3425.67 2415.16,3220.17 ; USB1.5@1906.57,2621.47 1855.56,2672.49 SW1.2@1855.55,2955.67 1855.56,3085.27 1840.16,3100.67 1840.16,3158.67 R3.1@1907.16,3225.67 ; R3.1@1907.11,3225.67 R2.1@1907.11,3310.67 ; R2.1@1907.16,3310.67 1840.16,3377.67 1840.16,3435.67 1908.76,3504.27 LED3.2@1908.81,3690.67 1908.76,3672.07 1955.16,3625.67 2175.16,3625.67 2285.16,3735.67 2398.96,3735.67 2440.16,3735.67 2530.16,3645.67 2570.76,3645.67 2620.76,3595.67 2630.16,3595.67 2720.16,3685.67 ; LED3.2@1908.81,3690.67 LED8.2@1908.81,4190.67 ; U2.4@2255.16,3169.17 2269.21,3155.12 C1.1@2350.16,3155.12 2350.16,3025.12 C66.1@2325.71,3000.67 ; C1.1@2350.16,3155.17 2415.16,3220.17 ; v1(2400.16,4175.67) 2465.16,4175.67 2690.16,3950.67 2690.16,3715.67 2720.16,3685.67 ; v1(2585.16,3235.67) 2430.66,3235.67 2415.16,3220.17 ; pad.4@2700.16,2305.67 v1(3240.16,2305.67) ; v1(2700.16,4190.67) 2755.16,4135.67 U7.10@2771.38,4135.67 ; C17.1@2829.61,2900.67 2884.55,2845.67 3205.16,2845.67 3240.16,2810.67 v1(3240.16,2605.67) ; C17.1@2829.61,2900.67 2910.71,2981.77 C7.1@2910.71,2990.67 ; C6.1@2834.61,3410.67 2834.56,3455.07 v1(2920.16,3540.67) ; C18.1@2834.61,3310.67 C6.1@2834.61,3410.67 2884.61,3360.67 2965.16,3360.67 2994.22,3331.61 U16.4@3240.91,3331.61 ; C7.1@2910.76,2990.67 2905.16,2996.17 2905.16,3030.67 2990.76,3116.27 U16.15@3242.96,3116.27 ; v1(3305.16,2605.67) 3305.16,2857.21 U16.26@3303.94,2858.43 3323.66,2858.47 3323.66,2899.17 3345.16,2920.67 3475.16,2920.67 3500.76,2895.07 3500.76,2858.47 3500.76,2670.07 3610.16,2560.67 3610.16,2525.17 C8.1@3655.16,2480.17 ; JTAG.12@3402.12,4855.67 JTAG.4@3802.12,4855.67 3854.07,4803.71 R6.1@3854.07,4750.67 3845.16,4741.77 v1(3845.16,4660.67) 3890.16,4615.67 4050.16,4615.67 4290.16,4855.67 v1(4650.16,4855.67) ; v1(3430.16,3875.67) 3430.16,3930.12 C20.1@3440.16,3940.12 ; U16.92@3461.42,3452.91 3461.42,3918.86 C20.1@3440.16,3940.12 ; U16.92@3461.46,3452.87 3461.46,3404.37 3470.16,3395.67 3490.16,3395.67 ; U16.90@3500.79,3452.91 3500.76,3406.27 3490.16,3395.67 ; C11.2@3520.16,4021.22 3520.16,4020.12 C20.1@3440.16,3940.12 ; C8.1@3655.16,2480.12 C19.1@3740.16,2480.12 3744.06,2480.12 C15.1@3825.16,2561.22 ; C10.2@3685.16,3786.22 C21.1@3765.16,3786.22 ; U16.80@3697.66,3452.87 3697.66,3538.17 3725.16,3565.67 3725.16,3786.17 C21.1@3765.16,3786.22 ; U16.80@3697.64,3452.91 3697.64,3413.15 3680.16,3395.67 3490.16,3395.67 ; U16.62@3837.4,3135.98 4131.02,3135.98 C9.2@4170.71,3175.67 C22.2@4170.71,3090.67 ; C22.2@4170.76,3090.67 4170.76,3081.17 4130.26,3040.67 4060.16,3040.67 4040.16,3060.67 4040.16,3085.67 4029.26,3096.57 U16.60@3837.4,3096.61 3791.06,3096.57 3775.16,3080.67 3775.16,2960.67 3717.36,2902.87 3717.36,2858.47 3717.33,2798.5 3765.16,2750.67 3765.16,2640.67 3825.16,2580.67 C15.1@3825.16,2561.22 ; v1(4655.16,1655.67) 4050.16,1655.67 4030.16,1675.67 4030.16,1730.67 3985.16,1775.67 3930.16,1775.67 3875.16,1830.67 3875.16,2511.22 C15.1@3825.16,2561.22 ; v1(4715.16,1595.67) 4775.16,1655.67 4775.16,1815.67 4870.16,1910.67 4930.16,1910.67 4970.76,1951.27 C62.2@4970.76,1960.67 ; v1(4715.16,4920.67) 4740.16,4895.67 4740.16,4655.67 4795.71,4600.12 C63.2@4870.16,4600.12 C65.2@4870.16,4516.22 4876.54,4509.84 U15.14@4973.82,4509.84 4973.82,4462.01 4990.16,4445.67 5025.16,4445.67 ; C62.2@4970.71,1960.67 4980.71,1970.67 5010.16,1970.67 5035,1995.51 U14.3@5035,2056.5 ; U15.12@5024.96,4509.87 5025.16,4445.67 ; U14.3@5035,2056.5 5034.96,2100.47 5105.16,2170.67 U14.29@5150.16,2170.67 ; U15.19@5076.18,4281.5 U15.21@5127.36,4281.5 5127.36,4382.87 U15.29@5140.16,4395.67 ; U15.20@5101.77,4281.5 5101.77,4199.24 R38.1@5098.2,4195.67 5098.2,4167.63 5225.16,4040.67 5330.16,4040.67 5360.16,4010.67 U6.19@5360.16,3950.83 5360.16,3815.67 5274.66,3730.17 C13.2@5215.16,3730.17 ; U14.20@5188.54,2284.84 5188.55,2402.1 R37.1@5192.11,2405.67 ; U14.19@5214.13,2284.84 U14.21@5162.95,2284.84 5162.96,2183.47 U14.29@5150.16,2170.67 ; C13.2@5215.16,3730.12 5215.16,3655.67 5292.44,3578.39 U6.1@5310.16,3578.39 ; U14.12@5265.36,2056.47 5265.16,2120.67 ; C61.2@5309.6,4615.67 5255.32,4561.38 U15.3@5255.31,4509.84 5255.32,4435.83 5215.16,4395.67 U15.29@5140.16,4395.67 ; U6.1@5310.16,3578.39 5310.16,3515.67 5345.16,3480.67 5725.16,3480.67 5760.16,3515.67 U6.10@5760.16,3578.39 ; U4.10@5315.16,3011.89 5315.16,3080.67 5350.16,3115.67 5740.16,3115.67 5765.16,3090.67 U4.1@5765.16,3011.89 ; C60.2@5410.16,1986.22 C64.2@5410.16,2070.12 5330.12,2070.12 U14.14@5316.49,2056.5 5316.5,2104.33 5300.16,2120.67 5265.16,2120.67 ; C53.2@5680.16,4595.12 C55.2@5680.16,4511.22 5683.78,4514.84 U13.14@5763.82,4514.84 ; C52.2@5760.76,1960.67 5785.16,1960.67 5824.96,2000.47 U12.3@5825,2056.5 5824.96,2095.47 5900.16,2170.67 U12.29@5940.16,2170.67 ; U13.14@5763.86,4514.87 5763.86,4451.97 5775.16,4440.67 5815.16,4440.67 ; U4.1@5765.16,3011.89 5813.94,3011.89 5855.16,2970.67 C12.2@5855.16,2866.22 5795.71,2866.22 5715.16,2785.67 U4.19@5715.16,2639.45 5715.16,2590.67 5900.16,2405.67 R31.1@5977.16,2405.67 ; U13.12@5814.96,4514.87 5815.16,4440.67 ; U13.19@5866.18,4286.5 U13.21@5917.36,4286.5 5917.36,4387.87 U13.29@5930.16,4400.67 ; U13.20@5891.77,4286.5 5891.77,4202.1 R32.1@5903.2,4190.67 ; R31.1@5977.11,2405.67 5978.55,2404.24 U12.20@5978.54,2284.84 ; U12.19@6004.13,2284.84 U12.21@5952.95,2284.84 5952.96,2183.47 U12.29@5940.16,2170.67 ; U12.12@6055.36,2056.47 6055.16,2120.67 ; C51.2@6104.6,4610.67 6085.16,4610.67 6045.36,4570.87 6045.36,4514.87 6045.16,4460.67 5985.16,4400.67 U13.29@5930.16,4400.67 ; C50.2@6200.16,1986.22 C54.2@6200.16,2070.12 6120.12,2070.12 U12.14@6106.49,2056.5 6106.5,2109.33 6095.16,2120.67 6055.16,2120.67 ; C41.2@6500.16,4595.12 C45.2@6500.16,4511.22 6508.78,4519.84 U11.14@6583.82,4519.84 ; U11.14@6583.86,4519.87 6583.86,4476.97 6595.36,4465.87 6634.96,4465.87 ; C40.2@6585.76,1965.67 6595.16,1965.67 6644.96,2015.47 U10.3@6645,2061.5 6644.96,2100.47 6720.16,2175.67 U10.29@6760.16,2175.67 ; U11.12@6634.96,4519.87 6634.96,4465.87 ; U11.19@6686.18,4291.5 U11.21@6737.36,4291.5 6737.36,4392.87 U11.29@6750.16,4405.67 ; U11.20@6711.77,4291.5 6711.77,4207.1 R26.1@6723.2,4195.67 6723.2,4152.63 6830.16,4045.67 6895.16,4045.67 6940.16,4000.67 U5.19@6940.16,3950.83 6940.16,3815.67 6855.16,3730.67 6795.16,3730.17 6795.16,3645.67 6862.46,3578.37 U5.1@6890.16,3578.39 6890.16,3505.67 6915.16,3480.67 7315.16,3480.67 7340.16,3505.67 U5.10@7340.16,3578.39 ; R25.1@6797.11,2390.67 6798.55,2389.24 U10.20@6798.54,2289.84 ; U10.19@6824.13,2289.84 U10.21@6772.95,2289.84 6772.96,2188.47 U10.29@6760.16,2175.67 ; 6875.16,2105.67 6875.16,2110.67 6915.16,2110.67 6926.46,2099.37 U10.14@6926.49,2061.5 ; U10.12@6875.36,2061.47 6875.36,2110.47 6810.16,2175.67 U10.29@6760.16,2175.67 ; U3.10@6900.16,3031.89 6900.16,3105.67 6930.16,3135.67 7320.16,3135.67 7350.16,3105.67 U3.1@7350.16,3031.89 ; C43.2@6924.6,4610.67 6900.16,4610.67 6865.16,4575.67 6865.36,4519.87 6865.36,4480.87 6790.16,4405.67 U11.29@6750.16,4405.67 ; U10.14@6926.49,2061.5 6927.88,2060.12 C44.2@7020.16,2060.12 C42.2@7020.16,1976.22 ; C33.2@7250.16,4595.12 C35.2@7250.16,4511.22 7263.78,4524.84 U9.14@7343.82,4524.84 ; C32.2@7335.76,1965.67 7365.16,1965.67 7394.96,1995.47 U8.3@7395,2061.5 7394.96,2095.47 7475.16,2175.67 U8.29@7510.16,2175.67 ; U5.10@7340.16,3578.39 7770.86,3578.39 ST17.2@7895.16,3454.09 ; U9.14@7343.86,4524.87 7343.86,4476.97 7355.36,4465.87 7394.96,4465.87 ; U3.1@7350.16,3031.89 7398.94,3031.89 7445.16,2985.67 C14.2@7445.16,2886.22 7375.71,2886.22 7300.16,2810.67 U3.19@7300.16,2659.45 7300.16,2610.67 7365.16,2545.67 7455.16,2545.67 ; U9.12@7394.96,4524.87 7394.96,4465.87 ; U9.19@7446.18,4296.5 U9.21@7497.36,4296.5 7497.36,4397.87 U9.29@7510.16,4410.67 ; U9.20@7471.77,4296.5 7471.77,4202.1 R20.1@7473.2,4200.67 ; U8.20@7548.54,2289.84 7548.55,2384.24 R19.1@7547.11,2385.67 7547.12,2453.71 7455.16,2545.67 ; U8.19@7574.13,2289.84 U8.21@7522.95,2289.84 7522.96,2188.47 U8.29@7510.16,2175.67 ; 7620.09,2110.67 7625.36,2110.67 7665.16,2110.67 7676.46,2099.37 U8.14@7676.49,2061.5 ; U8.12@7625.31,2061.5 7625.32,2105.51 7605.16,2125.67 7560.16,2125.67 U8.29@7510.16,2175.67 ; U8.14@7676.49,2061.5 7677.88,2060.12 C34.2@7770.16,2060.12 C30.2@7770.16,1976.22 ; C31.2@7679.56,4615.67 7665.16,4615.67 7625.36,4575.87 7625.36,4524.87 7625.36,4490.87 7545.16,4410.67 U9.29@7510.16,4410.67 ; ST17.2@7895.16,3454.09 7970.16,3379.07 7970.16,3170.67 7455.16,2655.67 7455.16,2545.67 ; 2720.16,3685.67 U7.1@2771.38,3685.67 2720.16,3685.67 ; 5025.16,4445.67 5075.16,4395.67 U15.29@5140.16,4395.67 ; U14.29@5150.16,2170.67 5215.16,2170.67 5265.16,2120.67 ; 5815.16,4440.67 5855.16,4400.67 U13.29@5930.16,4400.67 ; U12.29@5940.16,2170.67 6005.16,2170.67 6055.16,2120.67 ; 6634.96,4465.87 6695.16,4405.67 U11.29@6750.16,4405.67 ; 7394.96,4465.87 7450.16,4410.67 U9.29@7510.16,4410.67
  Top Layer w19.68: USB1.5@1906.57,2621.47 USB1.5@1906.57,2139.87 1906.58,2233.04 USB1.4@2005,2331.46 ; C2.1@2595.16,2266.22 2595.16,2280.67 2620.16,2305.67 pad.4@2700.16,2305.67 ; C18.1@2834.61,3310.67 2835.16,3310.12 v1(2835.16,3235.67) ; C61.2@5309.6,4615.67 5309.56,4670.07 5355.16,4715.67 5420.16,4715.67 5540.76,4595.17 C53.2@5680.16,4595.17 ; C60.2@5410.16,1986.22 5530.16,1985.67 5645.16,1870.67 5705.16,1870.67 5760.71,1926.22 C52.2@5760.71,1960.67 ; U6.10@5760.16,3578.39 5797.44,3615.67 v1(5810.16,3615.67) ; C12.2@5855.16,2866.22 5920.76,2866.17 6020.16,2965.67 v1(6020.16,3020.67) ; v1(6045.16,3540.67) 6180.16,3405.67 pad.42@6300.16,3405.67 ; C43.2@6924.6,4610.67 6924.56,4640.17 6995.16,4710.67 7065.16,4710.67 7180.76,4595.17 C33.2@7250.16,4595.17 ; C42.2@7020.16,1976.22 7089.66,1976.17 7205.16,1860.67 7285.16,1860.67 7335.76,1911.27 C32.2@7335.76,1965.67
  Top Layer w29.53: pad.42@6300.16,3405.67 pad.40@6400.16,3405.67 7846.74,3405.67 ST17.2@7895.16,3454.09
  Top Layer w39.37: USB1.5@1906.57,2621.47 1912.01,2616.04 C4.2@2305.15,2616.04 C3.2@2500.15,2616.04 ; U1.1@2485.71,2327.6 2547.09,2266.22 C2.1@2595.16,2266.22
  Bottom Layer w10: v1(2400.16,4175.67) 2685.16,4175.67 v1(2700.16,4190.67) ; pad.4@2700.16,2305.67 2585.16,2420.67 v1(2585.16,3235.67) v1(2835.16,3235.67) ; v1(2920.16,3540.67) 3075.16,3695.67 3600.16,3695.67 3645.16,3740.67 3645.16,3830.67 3600.16,3875.67 ; v1(3240.16,2305.67) v1(3240.16,2605.67) v1(3305.16,2605.67) ; v1(3430.16,3875.67) 3600.16,3875.67 ; v1(3845.16,4660.67) 3845.16,3960.67 3795.16,3910.67 3635.16,3910.67 3600.16,3875.67 ; v1(4650.16,4855.67) v1(4715.16,4920.67) ; v1(4655.16,1655.67) v1(4715.16,1595.67)
  Bottom Layer w19.68: v1(5810.16,3615.67) 5810.16,3590.67 5905.16,3495.67 6000.16,3495.67 v1(6045.16,3540.67) ; v1(6020.16,3020.67) 6020.16,3125.67 pad.42@6300.16,3405.67
GPIO0: NO1.5 U6.11 U16.87 | length 3391
  Top Layer w10: U16.87@3559.85,3452.91 3559.85,3880.36 3620.16,3940.67 3620.16,4365.67 3660.16,4405.67 NO1.5@4500.16,4405.67 4700.16,4405.67 4795.16,4310.67 4795.16,4190.67 4880.16,4105.67 v1(5000.16,4105.67) ; v1(5735.16,4040.67) 5760.16,4015.67 U6.11@5760.16,3950.83
  Bottom Layer w10: v1(5000.16,4105.67) 5670.16,4105.67 v1(5735.16,4040.67)
GPIO1: NO1.6 U6.13 U16.86 | length 3081
  Top Layer w10: U16.86@3579.53,3452.91 3579.53,3870.04 3645.16,3935.67 3645.16,4225.67 3725.16,4305.67 NO1.6@4500.16,4305.67 ; NO1.6@4505.16,4305.67 NO1.6@4500.16,4305.67 ; v1(5000.16,4065.67) 4880.16,4065.67 4765.16,4180.67 4765.16,4235.67 4695.16,4305.67 NO1.6@4500.16,4305.67 ; v1(5625.16,4040.67) 5660.16,4005.67 U6.13@5660.16,3950.83
  Bottom Layer w10: v1(5000.16,4065.67) 5290.16,4065.67 5310.16,4085.67 5580.16,4085.67 v1(5625.16,4040.67)
GPIO2: NO1.7 U6.15 U16.84 | length 2785.1
  Top Layer w10: U16.84@3618.9,3452.91 3618.86,3649.37 3640.16,3670.67 3640.16,3900.67 3665.16,3925.67 3665.16,4115.67 3755.16,4205.67 NO1.7@4500.16,4205.67 4700.16,4205.67 4880.16,4025.67 v1(5000.16,4025.67) ; v1(5525.16,4040.67) 5560.16,4005.67 U6.15@5560.16,3950.83
  Bottom Layer w10: v1(5000.16,4025.67) 5295.16,4025.67 5335.16,4065.67 5500.16,4065.67 v1(5525.16,4040.67)
GPIO3: NO1.8 U6.17 U16.83 | length 2546.7
  Top Layer w10: U16.83@3638.59,3452.91 3638.58,3614.1 v1(3660.16,3635.67) ; v1(3685.16,3870.67) 3685.16,4035.67 3755.16,4105.67 NO1.8@4500.16,4105.67 4760.16,4105.67 4875.16,3990.67 v1(5000.16,3990.67) ; v1(5430.16,4040.67) 5460.16,4010.67 U6.17@5460.16,3950.83
  Bottom Layer w10: v1(3660.16,3635.67) 3685.16,3660.67 v1(3685.16,3870.67) ; v1(5000.16,3990.67) 5305.16,3990.67 5355.16,4040.67 v1(5430.16,4040.67)
GPIO4: NO.16 U4.17 U16.9 | length 4673.2
  Top Layer w10: v1(3065.16,3215.67) 3082.68,3233.19 U16.9@3240.91,3233.19 ; v1(5615.16,2565.67) U4.17@5615.16,2659.45
  Bottom Layer w10: v1(3065.16,3215.67) 3080.16,3230.67 3160.16,3230.67 3260.16,3130.67 3260.16,2990.67 3350.16,2900.67 3700.16,2900.67 3900.16,2700.67 3900.16,1905.67 4100.16,1705.67 NO.16@4500.16,1705.67 4700.16,1705.67 4840.16,1845.67 4840.16,2325.67 4975.16,2460.67 5550.16,2460.67 5615.16,2525.67 v1(5615.16,2565.67)
GPIO5: U7.11 U16.10 | length 1928.8
  Top Layer w10: v1(2300.16,4135.67) U7.11@2398.94,4135.67 ; v1(2390.16,3580.67) 2455.16,3515.67 2580.16,3515.67 2615.16,3480.67 v1(2615.16,3175.67) ; v1(3125.16,3180.67) 3157.99,3213.5 U16.10@3240.91,3213.5
  Bottom Layer w10: v1(2300.16,4135.67) 2270.16,4105.67 2270.16,3700.67 v1(2390.16,3580.67) ; v1(2615.16,3175.67) 3120.16,3175.67 v1(3125.16,3180.67)
GPIO6: NO.3 pad.16 pad.37 U3.4 U16.58 | length 3710.6
  Top Layer w10: U16.58@3837.36,3057.27 4013.56,3057.27 4050.16,3020.67 4385.16,3020.67 4400.16,3005.67 NO.3@4500.16,3005.67 4710.16,3005.67 4780.16,3075.67 5220.16,3075.67 5305.16,3160.67 6045.16,3160.67 pad.16@6300.16,2905.67 pad.37@6400.16,2905.67 ; U3.4@7200.16,3031.89 v1(7200.16,3105.67)
  Bottom Layer w10: pad.37@6400.16,2905.67 6600.16,2905.67 6745.16,3050.67 7145.16,3050.67 v1(7200.16,3105.67)
GPIO7: NO.4 pad.15 pad.36 U3.2 U16.57 | length 3947.4
  Top Layer w10: U16.57@3837.4,3037.56 4003.26,3037.57 4040.16,3000.67 4305.16,3000.67 4400.16,2905.67 NO.4@4500.16,2905.67 4725.16,2905.67 4875.16,3055.67 5235.16,3055.67 5315.16,3135.67 5970.16,3135.67 pad.15@6300.16,2805.67 pad.36@6400.16,2805.67 ; U3.2@7300.16,3031.89 v1(7300.16,3105.67)
  Bottom Layer w10: pad.36@6400.16,2805.67 6600.16,2805.67 6820.16,3025.67 7220.16,3025.67 v1(7300.16,3105.67)
GPIO8: NO.6 pad.20 pad.34 U3.15 U16.54 | length 4011.1
  Top Layer w10: U16.54@3837.4,2978.5 3947.36,2978.47 3965.16,2960.67 4150.16,2960.67 4405.16,2705.67 NO.6@4500.16,2705.67 ; pad.20@6300.16,2605.67 pad.34@6400.16,2605.67 ; U3.15@7100.16,2659.45 7100.16,2595.67 v1(7115.16,2580.67)
  Bottom Layer w10: NO.6@4500.16,2705.67 4805.16,2705.67 5130.16,3030.67 5200.16,3030.67 5360.16,3190.67 5760.16,3190.67 6215.16,2735.67 6215.16,2645.67 6255.16,2605.67 pad.20@6300.16,2605.67 ; pad.34@6400.16,2605.67 6600.16,2605.67 6635.16,2640.67 7055.16,2640.67 v1(7115.16,2580.67)
GPIO9: U7.2 U16.49 | length 2488.4
  Top Layer w10: U7.2@2771.38,3735.67 2810.16,3735.67 2830.16,3715.67 2830.16,3665.67 2665.16,3500.67 2665.16,2815.67 2780.16,2700.67 v1(3190.16,2700.67) ; U16.49@3756.7,2858.43 3756.69,2819.13 3825.16,2750.67 v1(3825.16,2710.67)
  Bottom Layer w10: v1(3190.16,2700.67) 3500.16,2700.67 3575.16,2625.67 3745.16,2625.67 3825.16,2705.67 v1(3825.16,2710.67)
GPIO10: NO1.12 pad.14 pad.27 U5.11 U16.74 | length 4391.4
  Top Layer w10: U16.74@3837.4,3372.21 3871.66,3372.17 4205.16,3705.67 NO1.12@4500.16,3705.67 ; pad.14@6300.16,4005.67 pad.27@6400.16,4005.67 ; v1(7310.16,4035.67) 7340.16,4005.67 U5.11@7340.16,3950.83
  Bottom Layer w10: NO1.12@4500.16,3705.67 4795.16,3705.67 5095.16,3405.67 6090.16,3405.67 6170.16,3485.67 6170.16,3930.67 6245.16,4005.67 pad.14@6300.16,4005.67 ; pad.27@6400.16,4005.67 6505.16,4005.67 6550.16,3960.67 7235.16,3960.67 v1(7310.16,4035.67)
GPIO11: NO1.13 pad.7 pad.28 U5.8 U16.73 | length 3994.6
  Top Layer w10: U16.73@3837.36,3352.57 3882.06,3352.57 4135.16,3605.67 NO1.13@4500.16,3605.67 4700.16,3605.67 4850.16,3455.67 5725.16,3455.67 6175.16,3905.67 pad.7@6300.16,3905.67 pad.28@6400.16,3905.67 ; v1(7240.16,3505.67) U5.8@7240.16,3578.39
  Bottom Layer w10: pad.28@6400.16,3905.67 6595.16,3905.67 6895.16,3605.67 7140.16,3605.67 v1(7240.16,3505.67)
GPIO12: U7.8 U16.44 | length 2428.5
  Top Layer w10: U7.8@2771.38,4035.67 2815.16,4035.67 2890.16,3960.67 2890.16,3640.67 2725.16,3475.67 2725.16,2860.67 2800.16,2785.67 v1(3215.16,2785.67) ; U16.44@3658.27,2858.43 3658.27,2797.56 v1(3690.16,2765.67)
  Bottom Layer w10: v1(3215.16,2785.67) 3670.16,2785.67 v1(3690.16,2765.67)
GPIO13: NO1.2 U6.6 U16.95 | length 4184.3
  Top Layer w10: U16.95@3402.36,3452.91 3402.36,3613.47 3345.16,3670.67 3345.16,4245.67 3655.16,4555.67 4100.16,4555.67 4250.16,4705.67 NO1.2@4500.16,4705.67 ; v1(5560.16,3505.67) U6.6@5560.16,3578.39
  Bottom Layer w10: NO1.2@4500.16,4705.67 4700.16,4705.67 4780.16,4625.67 4780.16,4145.67 4930.16,3995.67 4930.16,3805.67 5185.16,3550.67 5515.16,3550.67 v1(5560.16,3505.67)
GPIO14: NO1.1 U6.8 U16.96 | length 4432.4
  Top Layer w10: U16.96@3382.68,3452.91 3382.66,3598.17 3320.16,3660.67 3320.16,4255.67 3645.16,4580.67 4075.16,4580.67 4300.16,4805.67 NO1.1@4500.16,4805.67 ; v1(5660.16,3505.67) U6.8@5660.16,3578.39
  Bottom Layer w10: NO1.1@4500.16,4805.67 4700.16,4805.67 4800.16,4705.67 4800.16,4170.67 4960.16,4010.67 4960.16,3820.67 5210.16,3570.67 5595.16,3570.67 v1(5660.16,3505.67)
GPIO15: NO1.4 U6.2 U16.88 | length 3597
  Top Layer w10: U16.88@3540.16,3452.91 3540.16,3885.67 3600.16,3945.67 3600.16,4420.67 3685.16,4505.67 NO1.4@4500.16,4505.67 ; v1(5360.16,3505.67) U6.2@5360.16,3578.39
  Bottom Layer w10: NO1.4@4500.16,4505.67 4700.16,4505.67 4740.16,4465.67 4740.16,4105.67 4870.16,3975.67 4870.16,3785.67 5150.16,3505.67 v1(5360.16,3505.67)
GPIO16: H3.8 U16.55 | length 2871.3
  Top Layer w10: v1(3000.16,4755.67) 3000.16,3755.67 v1(3265.16,3490.67) ; U16.55@3837.4,2998.19 3972.64,2998.19 v1(3985.16,2985.67)
  Bottom Layer w10: H3.8@2850.16,4955.67 2900.16,4905.67 2980.16,4905.67 3000.16,4885.67 v1(3000.16,4755.67) ; v1(3265.16,3490.67) 3280.16,3475.67 3280.16,3425.67 3460.16,3245.67 3460.16,3115.67 3475.16,3100.67 3795.16,3100.67 3900.16,2995.67 3975.16,2995.67 v1(3985.16,2985.67)